# Altium PCB PCB1.PcbDoc
Units mil, origin at the board's own origin, x right, y up, seen from the top; angles counter-clockwise.
Board outline 4850.03 x 4730.03 mil, 2 copper layers (Top Layer, Bottom Layer); 36 components, 18 nets, 174 pads, 0 vias.
Unrouted connection lines stored in the file: 7.
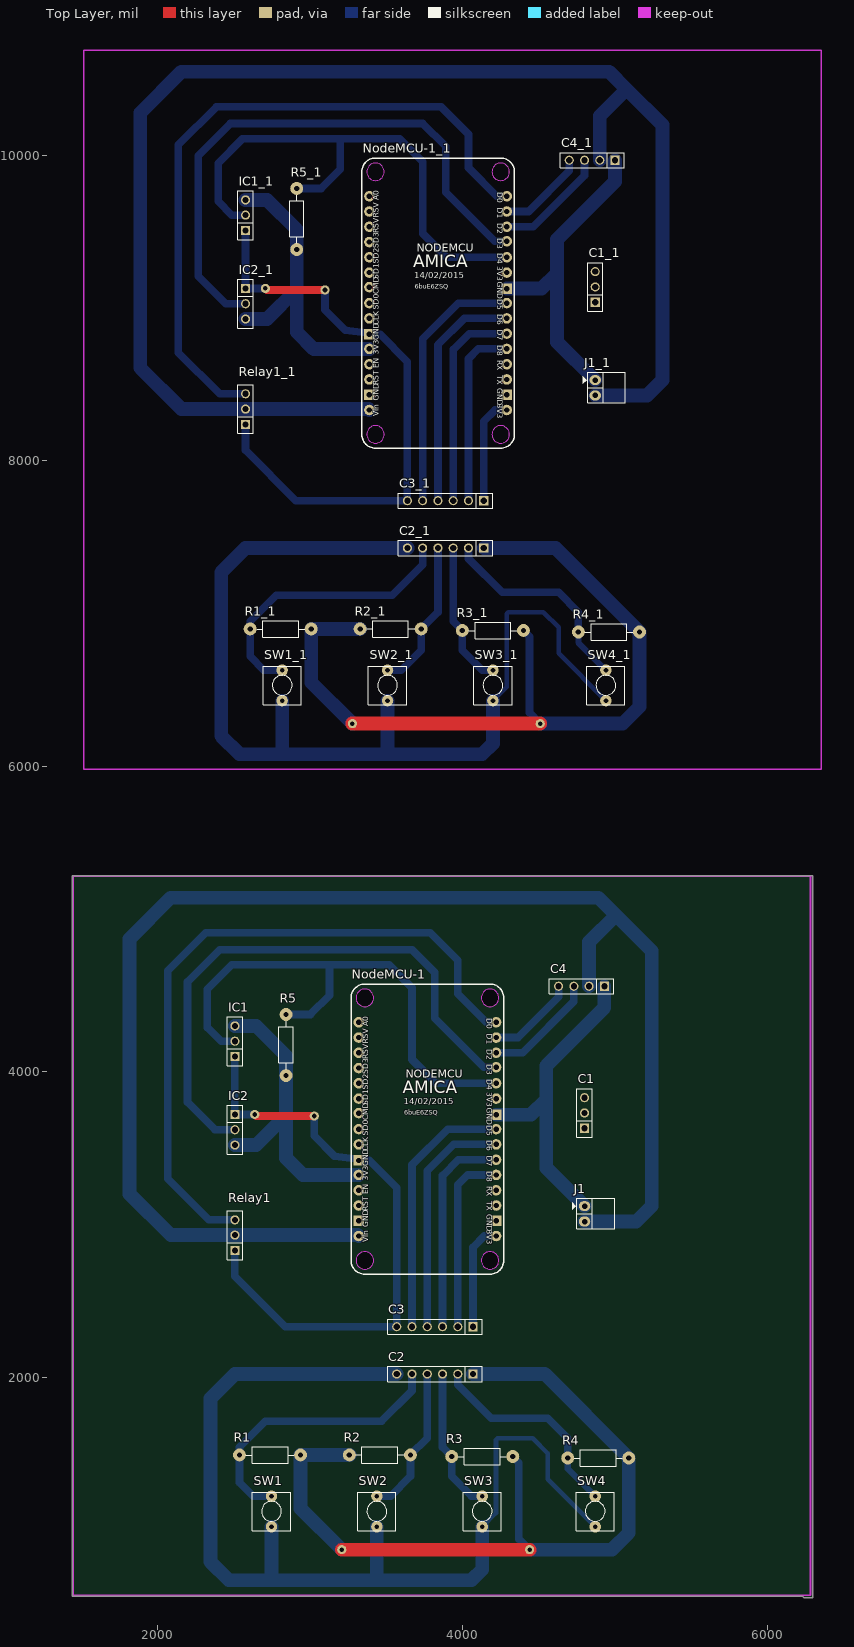
[diagram p0: Top Layer view]
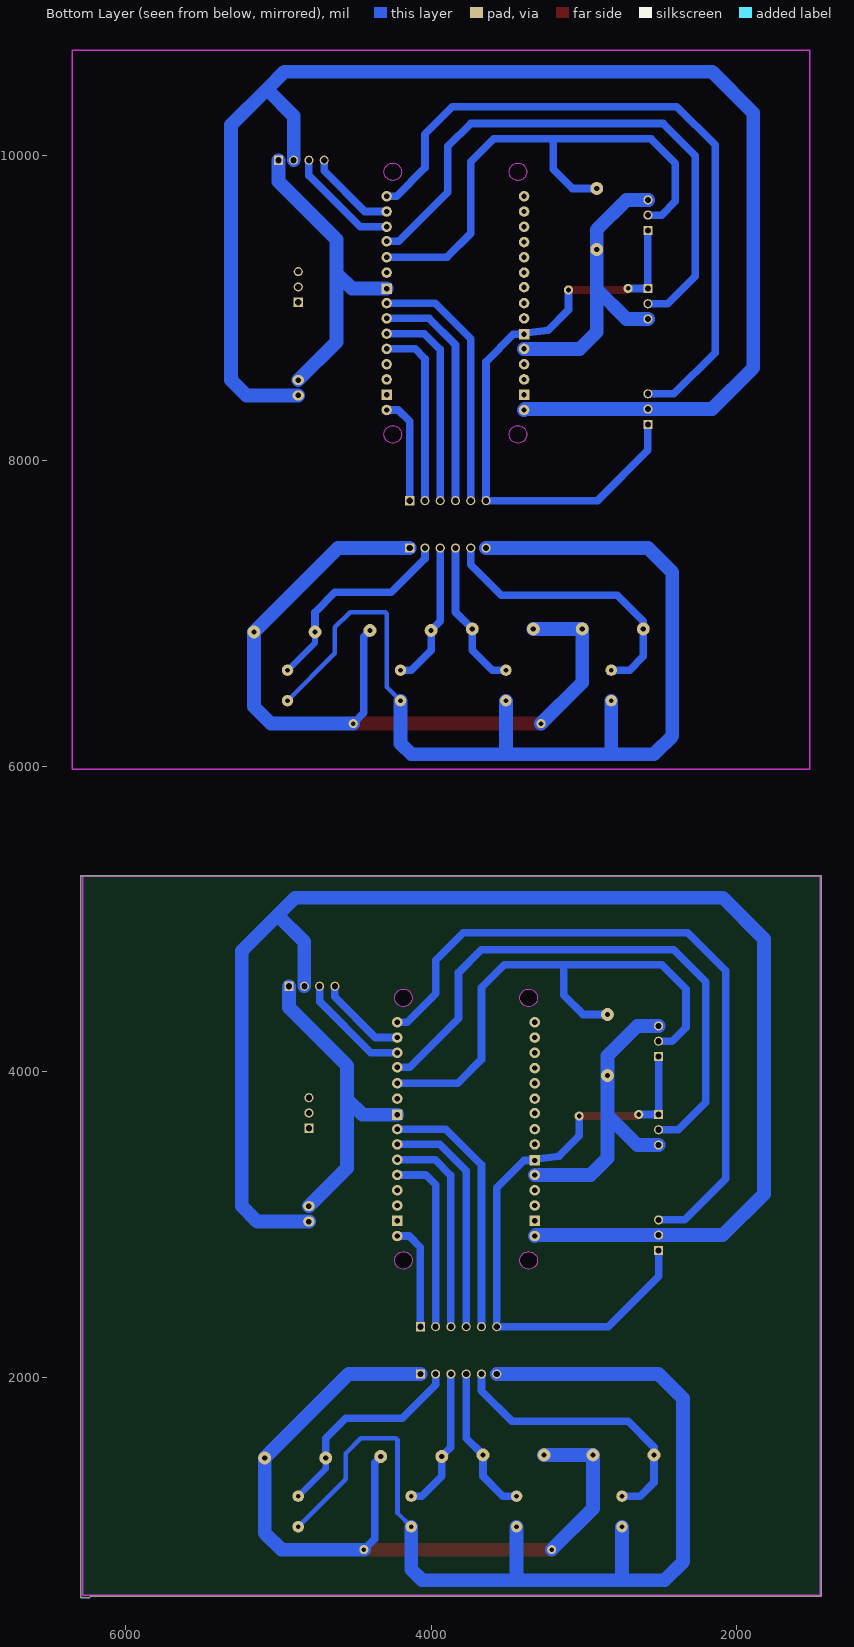
[diagram p1: Bottom Layer view, seen from below]

## Layer stack, top to bottom
Top Solder: solder mask 0.4, Solder Resist, Dk 3.5
Top Layer: signal copper 1.4
Dielectric 1: dielectric 12.6, FR-4, Dk 4.8
Bottom Layer: signal copper 1.4
Bottom Solder: solder mask 0.4, Solder Resist, Dk 3.5

## Board outline
1444.98,570 ccw(c1450,570) 1450,564.99 6227.92,564.99 6236.45,556.45 6236.44,556.47 ccw(c6240,560) 6240,554.99 6290,554.99 ccw(c6290,560) 6295.02,560 6295.02,5280 ccw(c6290,5280) 6290,5285.02 1450,5285.02 ccw(c1450,5280) 1444.98,5280

## Design rules (kind name [scope] priority, off if disabled: settings)
Clearance [All] p1: gap=10
PolygonConnect [All] p1: connectstyle=Relief reliefconductorwidth=10 reliefentries=4 polygonreliefangle="90 Angle" airgapwidth=10
RoutingVias [All] p1: holewidth=28 width=50 viastyle="Through Hole" minholewidth=28 minwidth=50 maxholewidth=28 maxwidth=50
SolderMaskExpansion [All] p1: expansion=4
Width [All] p1: maxlimit=90 minlimit=30 preferedwidth=50
30 further rules are at their usual default settings.

## Classes and differential pairs
component class Sheet1: C1 C2 C3 C4 IC1 IC2 J1 NodeMCU-1 R1 R2 R3 R4 R5 Relay1 SW1 SW2 SW3 SW4

## Components (designator, comment, footprint, x,y, rotation, side; value= is the part's Value field where it differs from the comment)
C1 "JP3" JP3-C1T 4800,3630 r90 top
C1_1 "JP3" JP3-C1T 4870,9040 r90 top (schematic designator C1)
C2 "JP6" JP6-C1T 4070,2020 r180 top
C2_1 "JP6" JP6-C1T 4140,7430 r180 top (schematic designator C2)
C3 "JP6" JP6-C1T 4070,2330 r180 top
C3_1 "JP6" JP6-C1T 4140,7740 r180 top (schematic designator C3)
C4 "JP4" JP4-C1T 4930,4560 r180 top
C4_1 "JP4" JP4-C1T 5000,9970 r180 top (schematic designator C4)
IC1 "DS18S20" JP3-C1T 2510,4100 r90 top
IC1_1 "DS18S20" JP3-C1T 2580,9510 r90 top (schematic designator IC1)
IC2 "Humi" JP3-C1T 2510,3720 r270 top
IC2_1 "Humi" JP3-C1T 2580,9130 r270 top (schematic designator IC2)
J1 "Jumper 2" jp2h 4800,3120 r270 top
J1_1 "Jumper 2" jp2h 4870,8530 r270 top (schematic designator J1)
NodeMCU-1 "NodeMCU V1.0 ESP-12E" "NodeMCU V1.0 ESP-12E" 3270,4570 r0 top
NodeMCU-1_1 "NodeMCU V1.0 ESP-12E" "NodeMCU V1.0 ESP-12E" 3340,9980 r0 top (schematic designator NodeMCU-1)
R1 "1k" R1/2W 2540,1490 r0 top
R1_1 "1k" R1/2W 2610,6900 r0 top (schematic designator R1)
R2 "1k" R1/2W 3660,1490 r180 top
R2_1 "1k" R1/2W 3730,6900 r180 top (schematic designator R2)
R3 "1k" R1/2W 3930,1480 r0 top
R3_1 "1k" R1/2W 4000,6890 r0 top (schematic designator R3)
R4 "1k" R1/2W 4690,1470 r0 top
R4_1 "1k" R1/2W 4760,6880 r0 top (schematic designator R4)
R5 "4k7" RES-1/4W 2850,4190 r90 top
R5_1 "4k7" RES-1/4W 2920,9600 r90 top (schematic designator R5)
Relay1 "Relay" JP3-C1T 2510,2830 r90 top
Relay1_1 "Relay" JP3-C1T 2580,8240 r90 top (schematic designator Relay1)
SW1 "Exit" SW2 2750,1220 r270 top
SW1_1 "Exit" SW2 2820,6630 r270 top (schematic designator SW1)
SW2 "Up" SW2 3440,1220 r270 top
SW2_1 "Up" SW2 3510,6630 r270 top (schematic designator SW2)
SW3 "Down" SW2 4130,1220 r270 top
SW3_1 "Down" SW2 4200,6630 r270 top (schematic designator SW3)
SW4 "Set" SW2 4870,1220 r270 top
SW4_1 "Set" SW2 4940,6630 r270 top (schematic designator SW4)

## Footprints (in the part's own frame and the unit in brackets; to place one, negate y for a bottom-side part, rotate by r counter-clockwise, add the part's x,y. Pads: shape width x height; smd on the part's side, far side on the other; paste and mask are expansions set on the pad)
jp2h [mil]
  oval 65x75 hole 36: 1(0,0) 2(101,0)
  silkscreen extent -50,-81 148,197, body extent -44,-14 148,424, height 99
JP3-C1T [mm] "3 row, straight, gold plating"
  rect 1.52x1.52 hole 1.02: 1(0,0)
  round 1.52 hole 1.02: 2(2.54,0) 3(5.08,0)
  silkscreen extent -1.52,-1.27 6.6,1.27, body extent -1.52,-1.25 6.6,1.25, height 8.51
JP4-C1T [mm] "4 row, straight, gold plating"
  rect 1.52x1.52 hole 1.02: 1(0,0)
  round 1.52 hole 1.02: 2(2.54,0) 3(5.08,0) 4(7.62,0)
  silkscreen extent -1.52,-1.27 9.14,1.27, body extent -1.52,-1.25 9.14,1.25, height 8.51
JP6-C1T [mm] "6 row, straight, gold plating"
  rect 1.52x1.52 hole 1.02: 1(0,0)
  round 1.52 hole 1.02: 2(2.54,0) 3(5.08,0) 4(7.62,0) 5(10.16,0) 6(12.7,0)
  silkscreen extent -1.52,-1.27 14.22,1.27, body extent -1.52,-1.25 14.22,1.25, height 8.51
"NodeMCU V1.0 ESP-12E" [mil]
  round 115 hole 115 unplated paste-300 mask-300: 0(91,-1806) 0(91,-86) 0(911,-1806) 0(911,-86)
  round 69 hole 35: 3V3(51,-1246) 3V3(951,-1646) 3V3(951,-746) A0(51,-246) CLK(51,-1046) CMD(51,-841) D0(951,-246) D1(951,-346) D2(951,-446) D3(951,-541) D4(951,-646) D5(951,-946) D6(951,-1046) D7(951,-1146) D8(951,-1246) EN(51,-1346) RST(51,-1446) RSV(51,-446) RSV(51,-346) RX(951,-1346) SD0(51,-946) SD1(51,-746) SD2(51,-646) SD3(51,-546) TX(951,-1446) VIN(51,-1646)
  rect 69x69 hole 35: GND(51,-1546) GND(51,-1151) GND(951,-1546) GND(951,-851)
  Keep-Out Layer circle w2: c91,-86 r57.5
  Keep-Out Layer circle w2: c911,-86 r57.5
  Keep-Out Layer circle w2: c91,-1806 r57.5
  Keep-Out Layer circle w2: c911,-1806 r57.5
  silkscreen extent 1,-1896 1001,4
R1/2W [mil] "R 1/2W, 2 pin, 300mil"
  round 85 hole 35: 1(0,0) 2(400,0)
  silkscreen extent 42,-55 356,55, body extent -12,-45 414,49, height 91
RES-1/4W [mil]
  round 85 hole 35: 1(-215,5) 2(185,5)
  silkscreen extent -173,-42 141,52, body extent -227,-42 197,52, height 95
SW2 [mil] "SW button 2pin, 250x 250 mil"
  round 75 hole 31: 1(0,0) 2(200,0)
  silkscreen extent -25,-125 225,125

## Part data
C1 C1_1 C2 C2_1 C3 C3_1 C4 C4_1: "WR-PHD 2.54 mm Angled Socket Header"
IC1 IC1_1: "High Precision  1-Wire® Digital Thermometer"
IC2 IC2_1: library part DS18S20, "High Precision  1-Wire® Digital Thermometer"
J1 J1_1: library part "JP 2"
NodeMCU-1 NodeMCU-1_1: "NodeMCU V1.0 ESP8266 (ESP-12E)"
R1 R1_1 R2 R2_1 R3 R3_1 R4 R4_1: library part R1/4W, "Resistor 1/4W"
R5 R5_1: library part Res, "Res"
Relay1 Relay1_1: library part JP3, "WR-PHD 2.54 mm Angled Socket Header"
SW1 SW1_1 SW2 SW2_1 SW3 SW3_1 SW4 SW4_1: library part SW2, "Switch button 2 pin"

## Free pads (board coordinates)
  round 60 hole 30: 2(3210,870) 2(3280,6280) 3(4440,870) 3(4510,6280) 4(3030,3710) 4(3100,9120) 5(3030,3710) 5(3100,9120) 6(2640,3720) 6(2710,9130)

## Nets (pads, with @x,y where several pads share a name; then routed paths per layer and width w, separated by ;. In a path a pad name is that pad's centre, name@x,y a point inside that pad or via, vN(x,y) a via of type N, cw(c..) or ccw(c..) an arc to the next point about the centre after c; other vN are vias at no path point)
220_IN: C1.3
DATA_HUM: IC2.2 NodeMCU-1.D3 | length 3777.6
  Bottom Layer w50: IC2.2 2380,3620 2200,3800 2200,4590 2410,4800 3670,4800 3820,4650 3820,4350 4141,4029 NodeMCU-1.D3
DATA_TEM: IC1.2 NodeMCU-1.D4 R5.2 | length 3558.1
  Bottom Layer w50: IC1.2 2420,4200 2330,4290 2330,4540 2490,4700 3130,4700 ; R5.2 3005,4375 3130,4500 3130,4700 ; NodeMCU-1.D4 3826,3924 3670,4080 3670,4550 3520,4700 3130,4700
DOWN: C2.3 R3.1 SW3.1 | length 948.7
  Bottom Layer w50: C2.3 3870,1540 R3.1 3930,1350 4060,1220 SW3.1
DOWN1: C3.3 NodeMCU-1.D7 | length 1384.1
  Bottom Layer w50: C3.3 3870,3320 3974,3424 NodeMCU-1.D7
EXIT: C2.5 R1.1 SW1.1 | length 1870.5
  Bottom Layer w50: SW1.1 2630,1220 2540,1310 R1.1 2540,1540 2710,1710 3470,1710 3670,1910 C2.5
EXIT1: C3.5 NodeMCU-1.D5 | length 1707.9
  Bottom Layer w50: C3.5 3670,3390 3904,3624 NodeMCU-1.D5
GND: C2.6 C3.6 C4.1 IC1.1 IC2.1 J1.1 NodeMCU-1.GND pad.4@3030,3710 pad.5@3030,3710 pad.6@2640,3720 Relay1.1 SW1.2 SW2.2 SW3.2 SW4.2 | length 12923.8
  Top Layer w50: pad.6@2640,3720 2650,3710 pad.5@3030,3710
  Bottom Layer w30: SW3.2 4220,1110 4220,1590 4230,1600 4460,1600 4560,1500 4560,1330 SW4.2
  Bottom Layer w50: Relay1.1 2510,2660 2840,2330 C3.6 3570,3240 3391,3419 ; IC1.1 IC2.1 pad.6@2640,3720 ; pad.5@3030,3710 3030,3580 3162.43,3447.57 3322.08,3427.62 3391,3419 ; NodeMCU-1.GND@3321,3419 3391,3419
  Bottom Layer w90: SW1.2 2750,680 2760,670 ; SW2.2 3440,670 ; C2.6 2510,2020 2350,1860 2350,790 2470,670 3440,670 ; SW3.2 4130,740 4060,670 3440,670 ; NodeMCU-1.GND@4221,3719 4449,3719 4550,3820 ; J1.1 4550,3370 4550,3820 ; C4.1 4930,4420 4550,4040 4550,3820
GND_IN: C1.1
OUT_DEAY: NodeMCU-1.D0 Relay1.3 | length 4538
  Bottom Layer w50: Relay1.3 2340,3030 2070,3300 2070,4660 2320,4910 3790,4910 3970,4730 3970,4510 4156,4324 NodeMCU-1.D0
SCL: C4.4 NodeMCU-1.D1 | length 589.2
  Bottom Layer w50: NodeMCU-1.D1 4364,4224 4630,4490 C4.4
SDA: C4.3 NodeMCU-1.D2 | length 748.2
  Bottom Layer w50: NodeMCU-1.D2 4394,4124 4730,4460 C4.3
SET: C2.2 R4.1 SW4.1 | length 1389.5
  Bottom Layer w40: R4.1 4690,1400 SW4.1
  Bottom Layer w50: C2.2 3970,1950 4190,1730 4560,1730 4690,1600 R4.1
SET1: C3.2 NodeMCU-1.D8 | length 1207.5
  Bottom Layer w50: C3.2 3970,3260 4034,3324 NodeMCU-1.D8
UP: C2.4 R2.1 SW2.1 | length 989.4
  Bottom Layer w50: SW2.1 3530,1220 3660,1350 R2.1 3770,1600 C2.4
UP1: C3.4 NodeMCU-1.D6 | length 1543.1
  Bottom Layer w50: C3.4 3770,3350 3944,3524 NodeMCU-1.D6
VCC: C2.1 C3.1 IC1.3 IC2.3 NodeMCU-1.3V3 pad.2@3210,870 pad.3@4440,870 R1.2 R2.2 R3.2 R4.2 R5.1 | length 8096
  Top Layer w90: pad.2@3210,870 pad.3@4440,870
  Bottom Layer w50: C3.1 4070,2850 4144,2924 NodeMCU-1.3V3@4221,2924 ; R3.2 4370,1440 4370,940 pad.3@4440,870
  Bottom Layer w90: IC2.3 2650,3520 2845,3715 ; IC1.3 2650,4300 2845,4105 R5.1 2845,3715 ; pad.2@3210,870 2940,1140 R1.2 R2.2 ; NodeMCU-1.3V3@3321,3324 2956,3324 2845,3435 2845,3715 ; C2.1 4540,2020 R4.2 5090,980 4980,870 pad.3@4440,870
VCC_5V: C4.2 J1.2 NodeMCU-1.VIN Relay1.2 | length 9651.5
  Bottom Layer w90: NodeMCU-1.VIN 3315,2930 Relay1.2 2090,2930 1820,3200 1820,4870 2090,5140 4890,5140 5005,5025 ; J1.2 5139,3019 5240,3120 5240,4790 5005,5025 ; C4.2 4830,4850 5005,5025
pads on no net: C1.2 C1_1.1 C1_1.2 C1_1.3 C2_1.1 C2_1.2 C2_1.3 C2_1.4 C2_1.5 C2_1.6 C3_1.1 C3_1.2 C3_1.3 C3_1.4 C3_1.5 C3_1.6 C4_1.1 C4_1.2 C4_1.3 C4_1.4 IC1_1.1 IC1_1.2 IC1_1.3 IC2_1.1 IC2_1.2 IC2_1.3 J1_1.1 J1_1.2 NodeMCU-1.0 NodeMCU-1.A0 NodeMCU-1.CLK NodeMCU-1.CMD NodeMCU-1.EN NodeMCU-1.RST NodeMCU-1.RSV NodeMCU-1.RX NodeMCU-1.SD0 NodeMCU-1.SD1 NodeMCU-1.SD2 NodeMCU-1.SD3 NodeMCU-1.TX NodeMCU-1_1.0 NodeMCU-1_1.3V3 NodeMCU-1_1.A0 NodeMCU-1_1.CLK NodeMCU-1_1.CMD NodeMCU-1_1.D0 NodeMCU-1_1.D1 NodeMCU-1_1.D2 NodeMCU-1_1.D3 NodeMCU-1_1.D4 NodeMCU-1_1.D5 NodeMCU-1_1.D6 NodeMCU-1_1.D7 NodeMCU-1_1.D8 NodeMCU-1_1.EN NodeMCU-1_1.GND NodeMCU-1_1.RST NodeMCU-1_1.RSV NodeMCU-1_1.RX NodeMCU-1_1.SD0 NodeMCU-1_1.SD1 NodeMCU-1_1.SD2 NodeMCU-1_1.SD3 NodeMCU-1_1.TX NodeMCU-1_1.VIN R1_1.1 R1_1.2 R2_1.1 R2_1.2 R3_1.1 R3_1.2 R4_1.1 R4_1.2 R5_1.1 R5_1.2 Relay1_1.1 Relay1_1.2 Relay1_1.3 SW1_1.1 SW1_1.2 SW2_1.1 SW2_1.2 SW3_1.1 SW3_1.2 SW4_1.1 SW4_1.2
copper on no net: | length 54923
  Top Layer w50: 2710,9130 2720,9120 3100,9120
  Top Layer w90: 3280,6280 4510,6280
  Bottom Layer w30: 4200,6430 4290,6520 4290,7000 4300,7010 4530,7010 4630,6910 4630,6740 4940,6430
  Bottom Layer w40: 4760,6880 4760,6810 4940,6630
  Bottom Layer w50: 2580,8240 2580,8070 2910,7740 3640,7740 3640,8650 3461,8829 ; 2580,8440 2410,8440 2140,8710 2140,10070 2390,10320 3860,10320 4040,10140 4040,9920 4226,9734 4291,9734 ; 2580,9030 2450,9030 2270,9210 2270,10000 2480,10210 3740,10210 3890,10060 3890,9760 4211,9439 4291,9439 ; 2580,9510 2580,9130 2710,9130 ; 2580,9610 2490,9610 2400,9700 2400,9950 2560,10110 3200,10110 ; 2820,6630 2700,6630 2610,6720 2610,6900 2610,6950 2780,7120 3540,7120 3740,7320 3740,7430 ; 2915,9785 3075,9785 3200,9910 3200,10110 ; 3100,9120 3100,8990 3232.43,8857.57 3392.08,8837.62 3461,8829 ; 3391,8829 3461,8829 ; 3510,6630 3600,6630 3730,6760 3730,6900 3840,7010 3840,7430 ; 3740,7740 3740,8800 3974,9034 4291,9034 ; 3840,7740 3840,8760 4014,8934 4291,8934 ; 3940,7430 3940,6950 4000,6890 4000,6760 4130,6630 4200,6630 ; 3940,7740 3940,8730 4044,8834 4291,8834 ; 4040,7430 4040,7360 4260,7140 4630,7140 4760,7010 4760,6880 ; 4040,7740 4040,8670 4104,8734 4291,8734 ; 4140,7740 4140,8260 4214,8334 4291,8334 ; 4291,9334 3896,9334 3740,9490 3740,9960 3590,10110 3200,10110 ; 4291,9534 4464,9534 4800,9870 4800,9970 ; 4291,9634 4434,9634 4700,9900 4700,9970 ; 4400,6890 4440,6850 4440,6350 4510,6280
  Bottom Layer w90: 2580,8930 2720,8930 2915,9125 ; 2580,9710 2720,9710 2915,9515 2915,9385 2915,9125 ; 2820,6430 2820,6090 2830,6080 ; 3280,6280 3010,6550 3010,6900 3330,6900 ; 3391,8334 3385,8340 2580,8340 2160,8340 1890,8610 1890,10280 2160,10550 4960,10550 5075,10435 ; 3391,8734 3026,8734 2915,8845 2915,9125 ; 3510,6430 3510,6080 ; 3640,7430 2580,7430 2420,7270 2420,6200 2540,6080 3510,6080 ; 4140,7430 4610,7430 5160,6880 5160,6390 5050,6280 4510,6280 ; 4200,6430 4200,6150 4130,6080 3510,6080 ; 4291,9129 4519,9129 4620,9230 ; 4870,8429 5209,8429 5310,8530 5310,10200 5075,10435 ; 4870,8530 4620,8780 4620,9230 ; 4900,9970 4900,10260 5075,10435 ; 5000,9970 5000,9830 4620,9450 4620,9230

## Keep-outs
Keep-Out Layer:
  lines w10: 6230,570 6280,570 6280,5280 1450,5280 1450,570 6240,570 ; 6300,5980 6350,5980 6350,10690 1520,10690 1520,5980 6310,5980

## Text inside footprints (layer, text, board x,y; h text height)
NodeMCU-1: Top Overlay "GND" at 3396,3382 h60 r90; Top Overlay "3V3" at 3396,3285 h60 r90; Top Overlay "EN" at 3396,3198 h60 r90; Top Overlay "RST" at 3396,3086 h60 r90; Top Overlay "GND" at 3396,2983 h60 r90; Top Overlay "Vin" at 3396,2883 h60 r90; Top Overlay "D7" at 4146,3448.77 h60 r270; Top Overlay "D8" at 4146,3348.89 h60 r270; Top Overlay "RX" at 4146,3249.94 h60 r270; Top Overlay "TX" at 4146,3151 h60 r270; Top Overlay "GND" at 4146,3067.8 h60 r270; Top Overlay "3V3" at 4146,2964 h60 r270; Top Overlay "D6" at 4146,3549.88 h60 r270; Top Overlay "CMD" at 3396,3680.86 h60 r90; Top Overlay "D0" at 4146,4350 h60 r270; Top Overlay "D1" at 4146,4248.65 h60 r270; Top Overlay "D2" at 4146,4148.42 h60 r270; Top Overlay "D3" at 4146,4048.42 h60 r270; Top Overlay "D4" at 4146,3950 h60 r270; Top Overlay "3V3" at 4146,3864.99 h60 r270; Top Overlay "GND" at 4146,3763 h60 r270; Top Overlay "D5" at 4146,3649 h60 r270; Top Overlay "A0" at 3396,4297 h60 r90; Top Overlay "RSV" at 3396,4183 h60 r90; Top Overlay "RSV" at 3396,4082.57 h60 r90; Top Overlay "SD3" at 3396,3982.14 h60 r90; Top Overlay "SD2" at 3396,3881.71 h60 r90; Top Overlay "SD1" at 3396,3781.29 h60 r90; Top Overlay "SD0" at 3396,3580.43 h60 r90; Top Overlay "CLK" at 3396,3480 h60 r90; Top Overlay "6buE6ZSQ" at 3619,3717 h30; Top Overlay "NODEMCU" at 3630,3941 h90; Top Overlay "AMICA" at 3609,3831 h140; Top Overlay "14/02/2015" at 3615,3772 h69
NodeMCU-1_1: Top Overlay "GND" at 3466,8792 h60 r90; Top Overlay "3V3" at 3466,8695 h60 r90; Top Overlay "EN" at 3466,8608 h60 r90; Top Overlay "RST" at 3466,8496 h60 r90; Top Overlay "GND" at 3466,8393 h60 r90; Top Overlay "Vin" at 3466,8293 h60 r90; Top Overlay "D7" at 4216,8858.77 h60 r270; Top Overlay "D8" at 4216,8758.89 h60 r270; Top Overlay "RX" at 4216,8659.94 h60 r270; Top Overlay "TX" at 4216,8561 h60 r270; Top Overlay "GND" at 4216,8477.8 h60 r270; Top Overlay "3V3" at 4216,8374 h60 r270; Top Overlay "D6" at 4216,8959.88 h60 r270; Top Overlay "CMD" at 3466,9090.86 h60 r90; Top Overlay "D0" at 4216,9760 h60 r270; Top Overlay "D1" at 4216,9658.65 h60 r270; Top Overlay "D2" at 4216,9558.42 h60 r270; Top Overlay "D3" at 4216,9458.42 h60 r270; Top Overlay "D4" at 4216,9360 h60 r270; Top Overlay "3V3" at 4216,9274.99 h60 r270; Top Overlay "GND" at 4216,9173 h60 r270; Top Overlay "D5" at 4216,9059 h60 r270; Top Overlay "A0" at 3466,9707 h60 r90; Top Overlay "RSV" at 3466,9593 h60 r90; Top Overlay "RSV" at 3466,9492.57 h60 r90; Top Overlay "SD3" at 3466,9392.14 h60 r90; Top Overlay "SD2" at 3466,9291.71 h60 r90; Top Overlay "SD1" at 3466,9191.29 h60 r90; Top Overlay "SD0" at 3466,8990.43 h60 r90; Top Overlay "CLK" at 3466,8890 h60 r90; Top Overlay "6buE6ZSQ" at 3689,9127 h30; Top Overlay "NODEMCU" at 3700,9351 h90; Top Overlay "AMICA" at 3679,9241 h140; Top Overlay "14/02/2015" at 3685,9182 h69